# Altium PCB PCB1.PcbDoc
Units mil, origin at the board's own origin, x right, y up, seen from the top; angles counter-clockwise.
Board outline 6000 x 4000 mil, 2 copper layers (Top Layer, Bottom Layer); 10 components, 6 nets, 27 pads, 0 vias.
Unrouted connection lines stored in the file: 21.
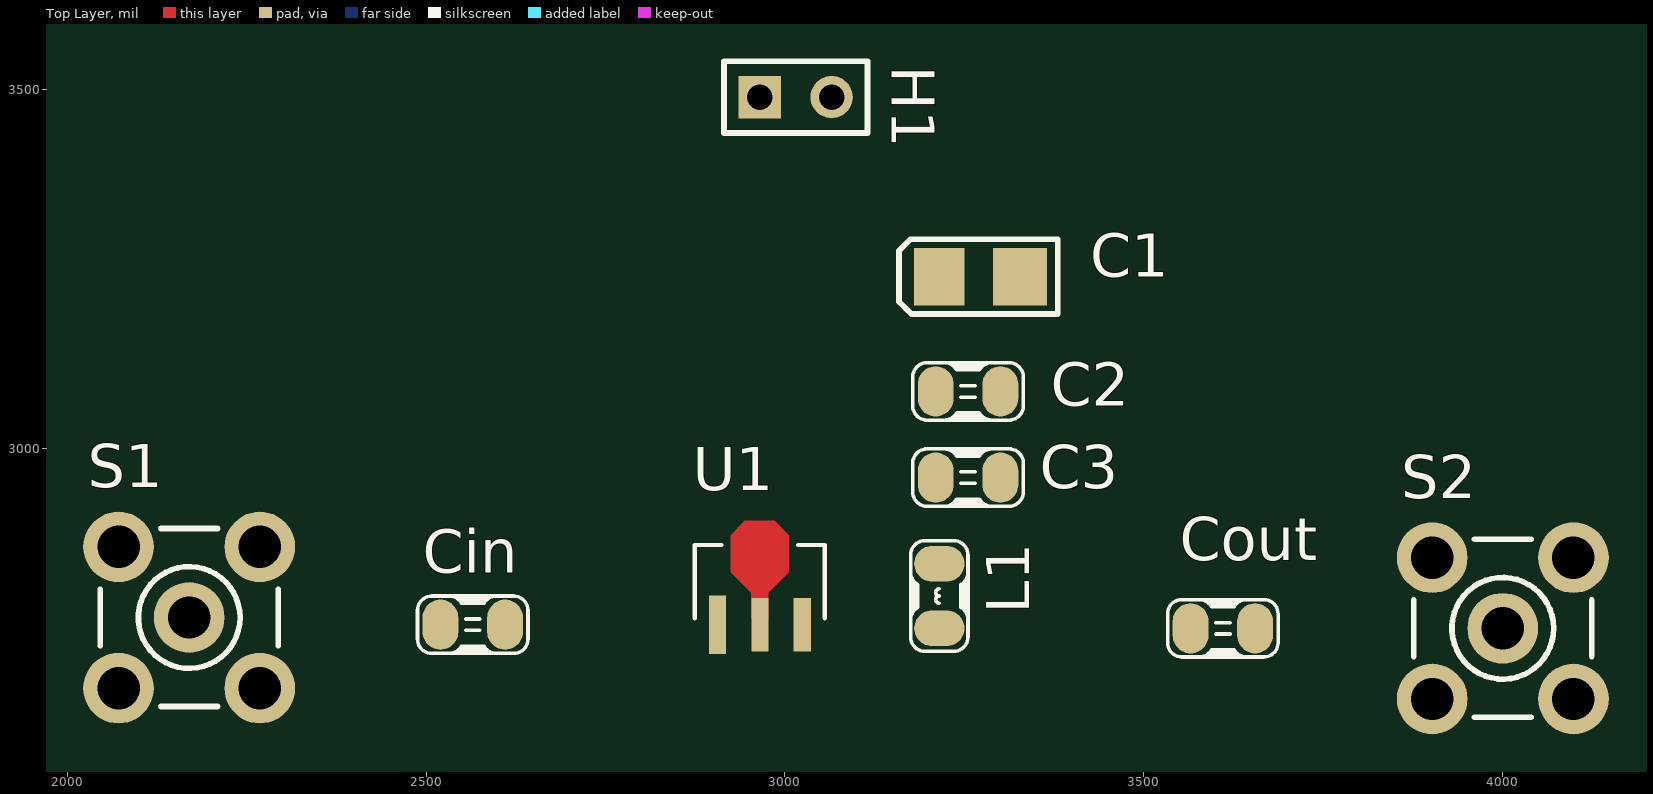
[diagram p0: Top Layer view]
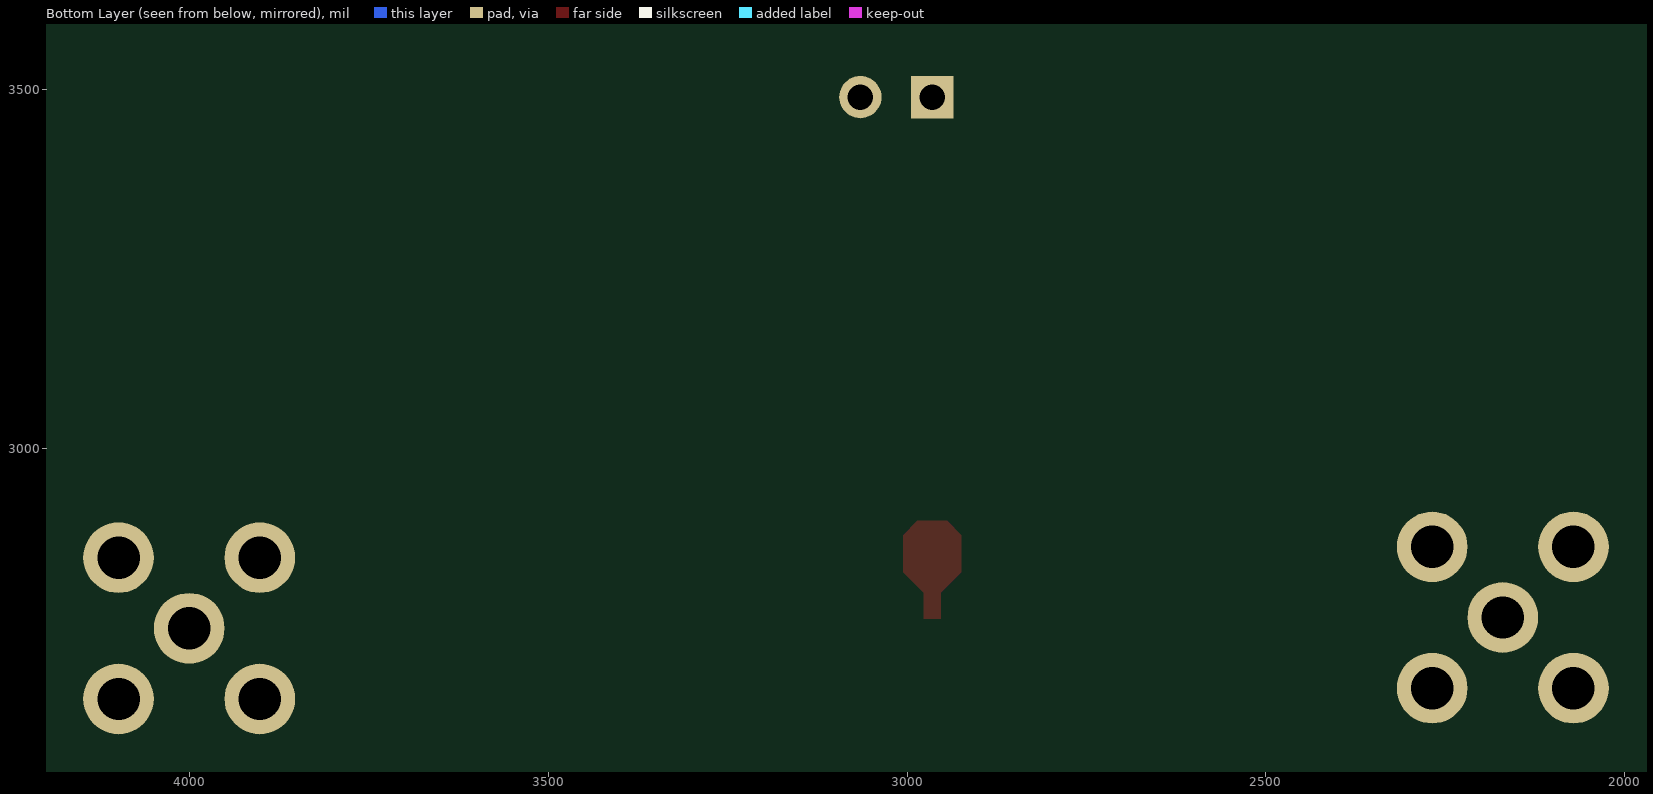
[diagram p1: Bottom Layer view, seen from below]

## Layer stack, top to bottom
Top Solder: solder mask 0.4, Solder Resist, Dk 3.5
Top Layer: signal copper 1.4
Dielectric 1: dielectric 12.6, FR-4, Dk 4.8
Bottom Layer: signal copper 1.4
Bottom Solder: solder mask 0.4, Solder Resist, Dk 3.5

## Board outline
1000,1000 7000,1000 7000,5000 1000,5000

## Design rules (kind name [scope] priority, off if disabled: settings)
Clearance [All] p1: gap=10
PolygonConnect [All] p1: connectstyle=Relief reliefconductorwidth=10 reliefentries=4 polygonreliefangle="90 Angle" airgapwidth=10
RoutingVias [All] p1: holewidth=28 width=50 viastyle="Through Hole" minholewidth=28 minwidth=50 maxholewidth=28 maxwidth=50
SolderMaskExpansion [All] p1: expansion=4
Width GND [InNet('GND')] p1: maxlimit=10 minlimit=10 preferedwidth=10
Width [All] p2: maxlimit=10 minlimit=10 preferedwidth=10
30 further rules are at their usual default settings.

## Components (designator, comment, footprint, x,y, rotation, side; value= is the part's Value field where it differs from the comment)
C1 "Cap" CAP_SMD_3216 3215,3240 r0 top
C2 "Cap" 0805C 3210,3080 r0 top
C3 "Cap" 0805C 3210,2960 r0 top
Cin "Cap" 0805C 2520,2755 r0 top
Cout "Cap" 0805C 3565,2750 r0 top
H1 "Header 2" HDR1X2 2965,3490 r0 top
L1 "Inductor" 0805L 3215,2750 r90 top
S1 "SMB" SMB_V-RJ45 2170,2765 r0 top
S2 "SMB" SMB_V-RJ45 4000,2750 r0 top
U1 "ADL5545ARKZ-R7" RK_3 2965,2815 r0 top

## Footprints (in the part's own frame and the unit in brackets; to place one, negate y for a bottom-side part, rotate by r counter-clockwise, add the part's x,y. Pads: shape width x height; smd on the part's side, far side on the other; paste and mask are expansions set on the pad)
0805C [mil] "0805封装电容"
  oval 50x70 smd: 1(0,0) 2(90,0)
  silkscreen extent -32,-40 122,40, body extent 3,-25 82,25, height 30
0805L [mil] "0805封装电感"
  oval 50x70 smd: 1(0,0) 2(90,0)
  silkscreen extent -32,-40 122,40, body extent 7,-25 85,22, height 37
CAP_SMD_3216 [mil] "贴片钽电容，10uF"
  rect 70x80 smd: 1(0,0)
  rect 75x80 smd: 2(112.2,0)
  silkscreen extent -56,-52 165,52, body extent -11,-35 123,35, height 63
HDR1X2 [mm] "Connector; Header; 2 Position"
  rect 1.5x1.5 hole 0.9: 1(0,0)
  round 1.5 hole 0.9: 2(2.54,0)
  silkscreen extent -1.27,-1.27 3.81,1.27
RK_3 [mil]
  rect 24x81 smd: 1(-59.06,-60)
  rect 24x75 smd: 2(0,-60) 3(59.06,-60)
  Top Layer region: 12,-52 -12,-52 -12,-15.5 -40.5,13 -40.5,64.75 -20.75,84.5 20.75,84.5 40.5,64.75 40.5,13 12,-15.5
  silkscreen extent -90,-51 90,51, body extent 0,0 10,10, height 10
SMB_V-RJ45 [mm] "Connector; SMB Straight"
  round 2.5 hole 1.5: 1(0,0) 2(-2.5,-2.5) 2(-2.5,2.5) 2(2.5,-2.5) 2(2.5,2.5)
  silkscreen extent -3.15,-3.15 3.15,3.15

## Part data
C1 C2 C3 Cin Cout: "Capacitor"
H1: "Header, 2-Pin"
S1 S2: "SMB Straight Connector"
U1: "Imported"

## Nets (pads, with @x,y where several pads share a name; then routed paths per layer and width w, separated by ;. In a path a pad name is that pad's centre, name@x,y a point inside that pad or via, vN(x,y) a via of type N, cw(c..) or ccw(c..) an arc to the next point about the centre after c; other vN are vias at no path point)
GND: C1.2 C2.2 C3.2 H1.1 S1.2 S2.2 U1.2
NetCin_1: Cin.1 S1.1
NetCin_2: Cin.2 U1.1
NetCout_1: Cout.1 L1.1 U1.3
NetCout_2: Cout.2 S2.1
VCC: C1.1 C2.1 C3.1 H1.2 L1.2